# Altium PCB pcb.PcbDoc
Units mm, origin at the board's own origin, x right, y up, seen from the top; angles counter-clockwise.
Board outline 60 x 89 mm, 4 copper layers (Top Layer, Layer 1, Layer 2, Bottom Layer), stack 0.603 mm thick; 66 components, 44 nets, 228 pads, 102 vias.
Unrouted connection lines stored in the file: 2.
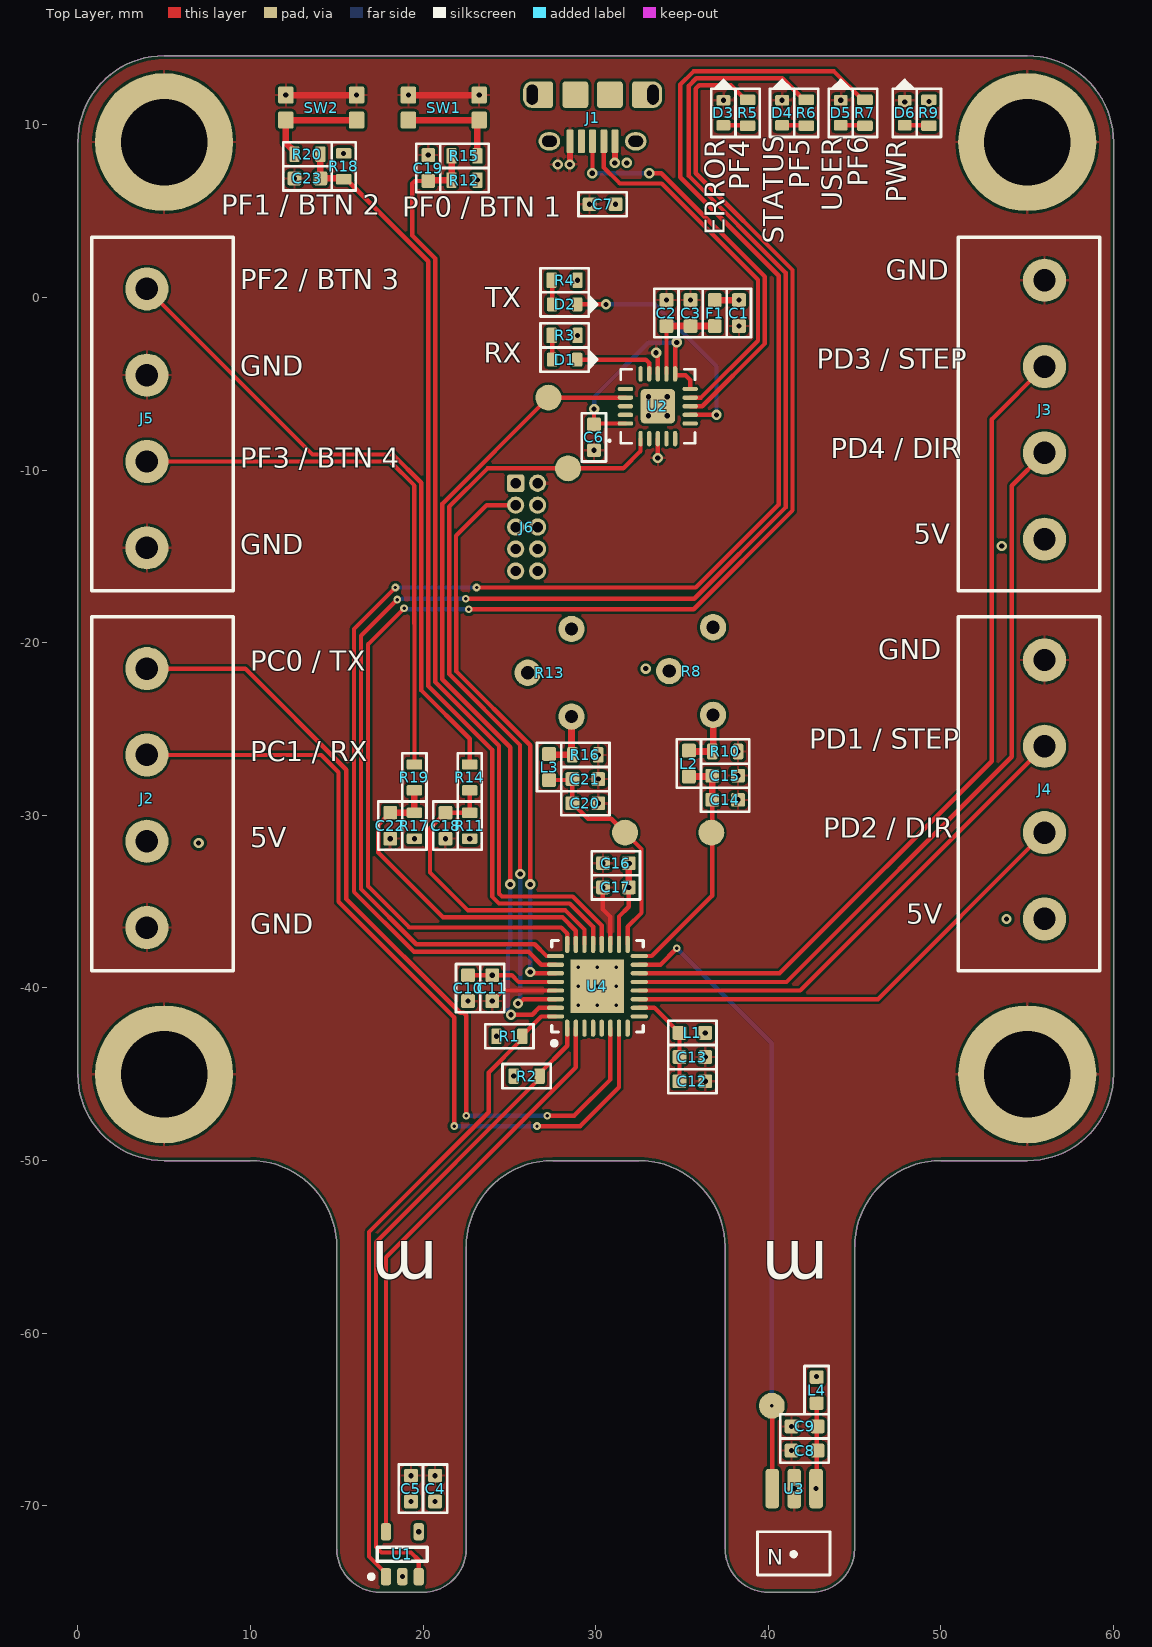
[diagram p0: Top Layer view]
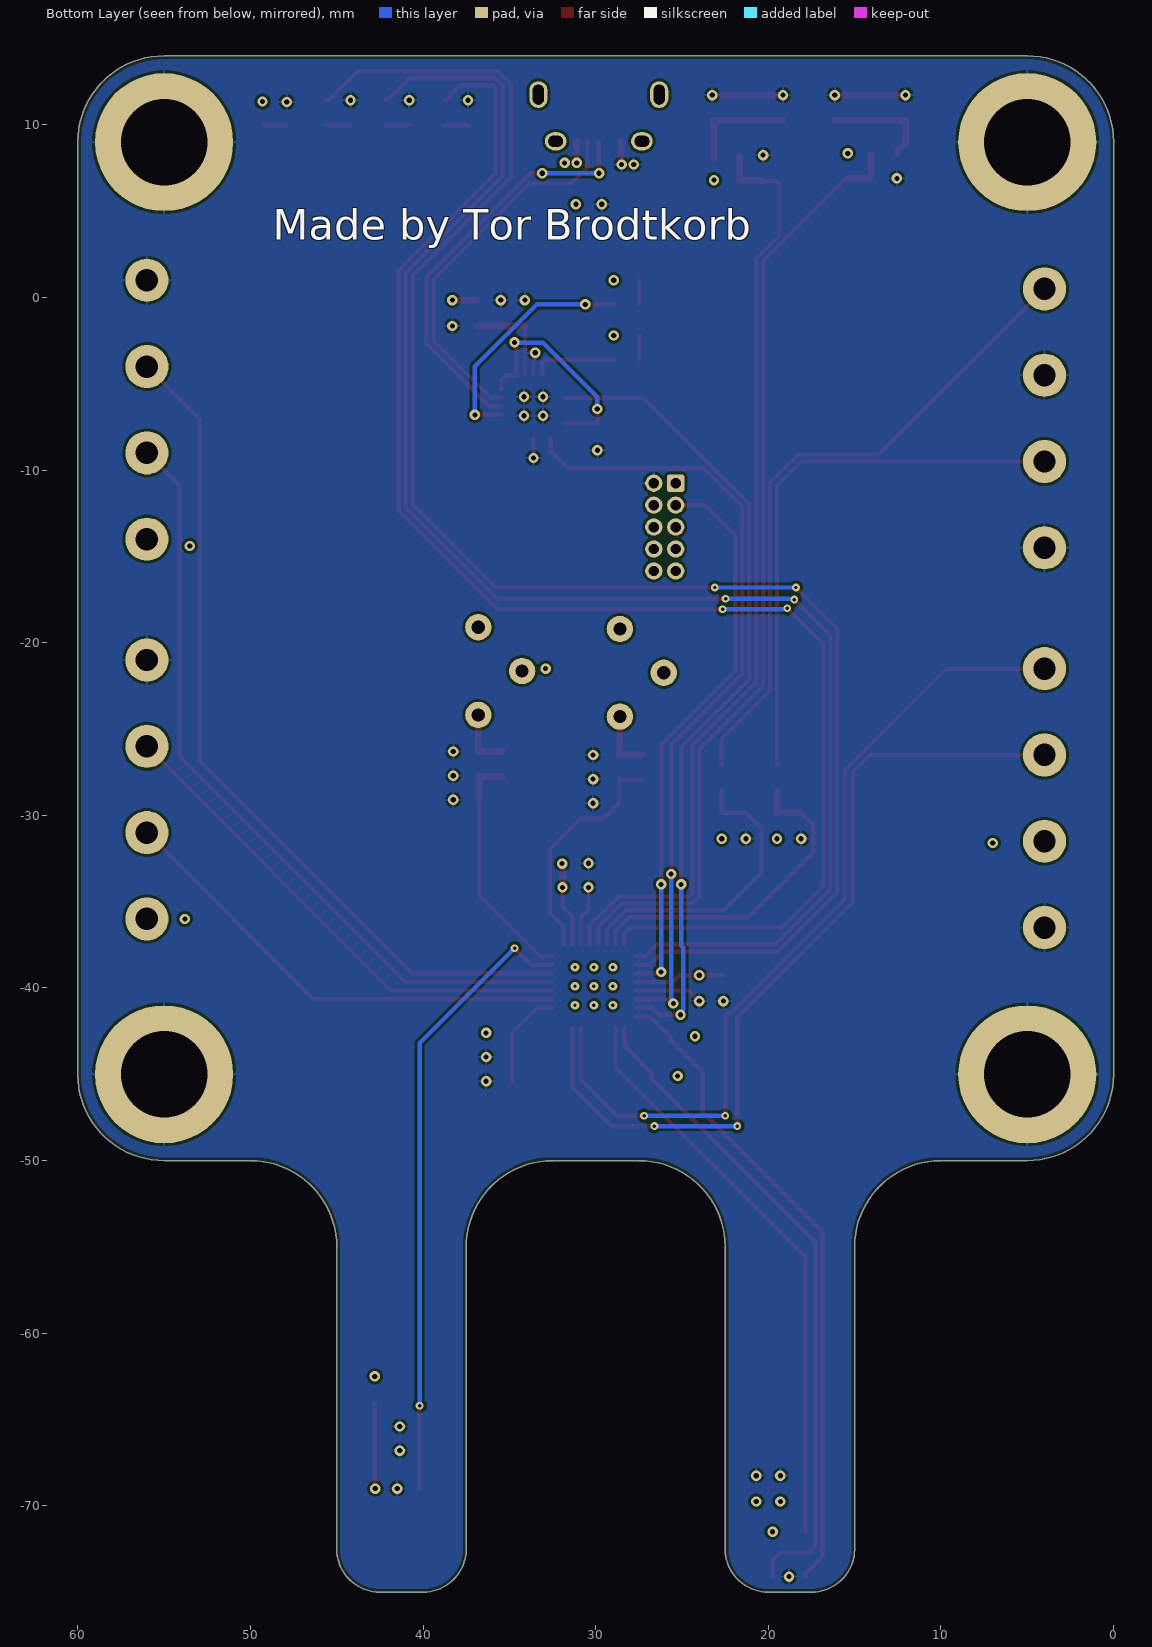
[diagram p1: Bottom Layer view, seen from below]
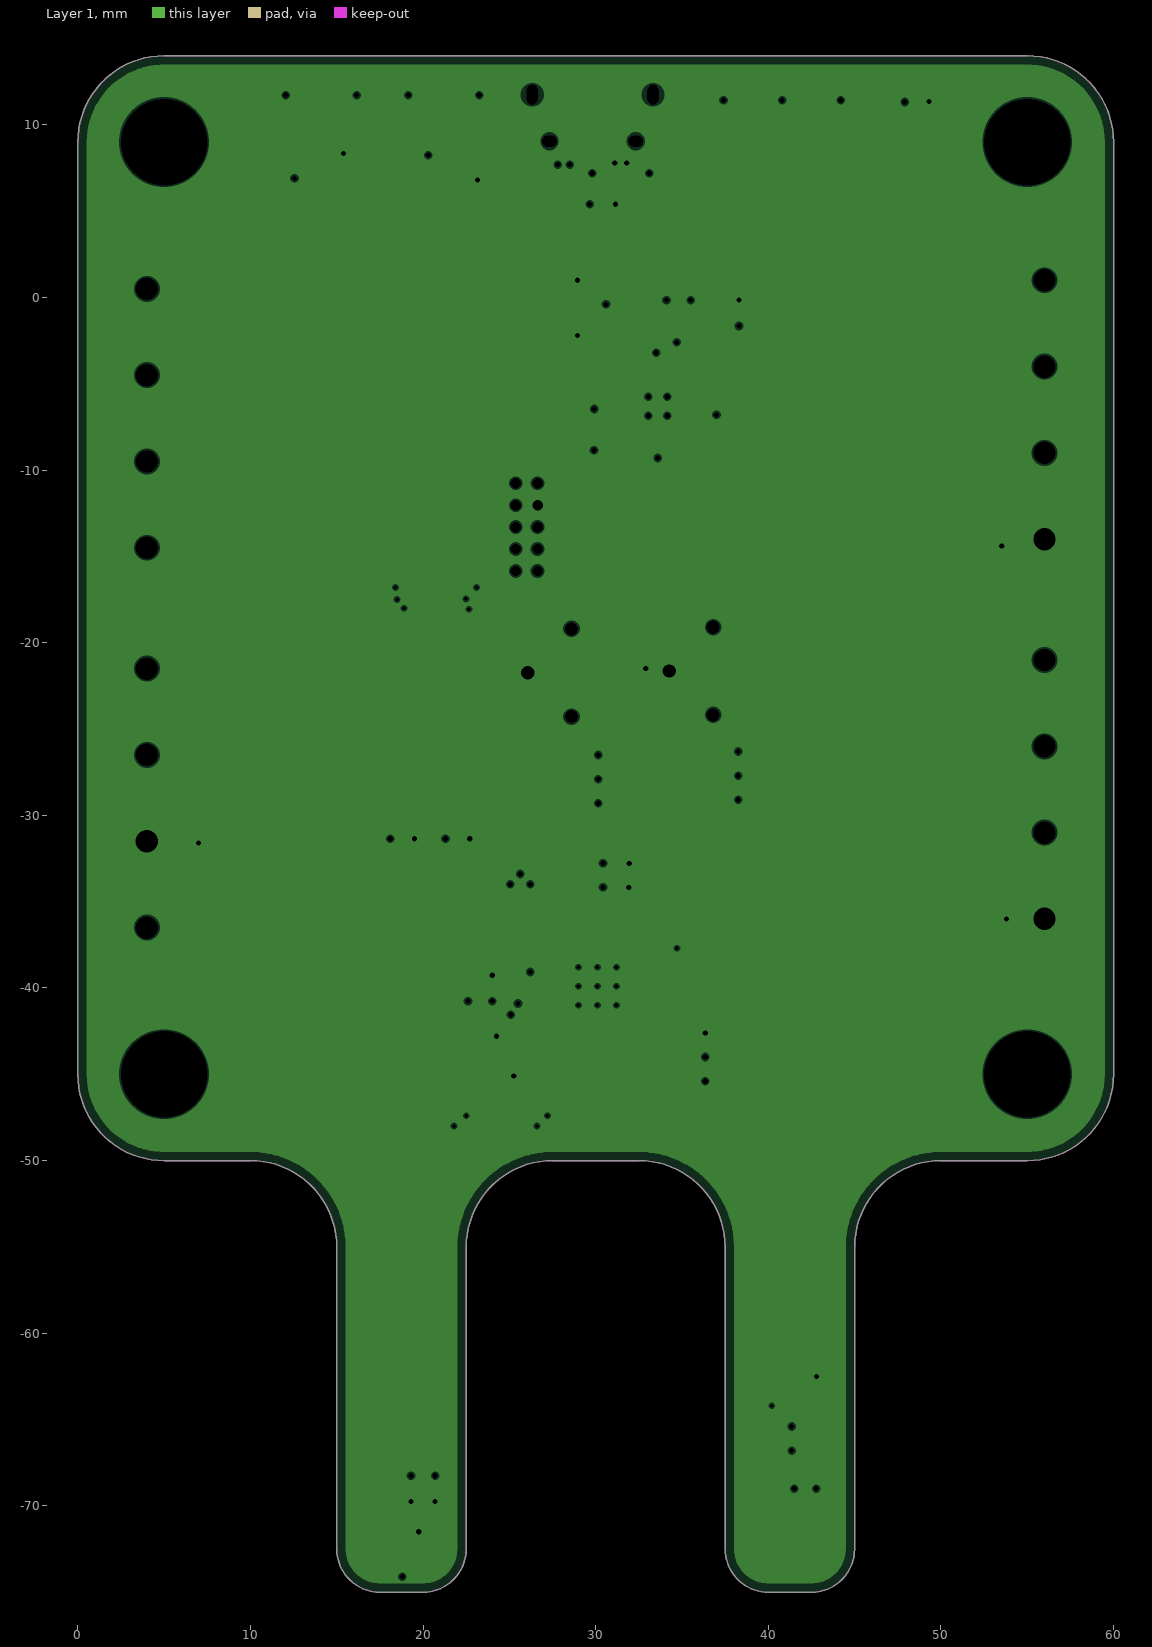
[diagram p2: Layer 1, clearances drawn from the general rule]
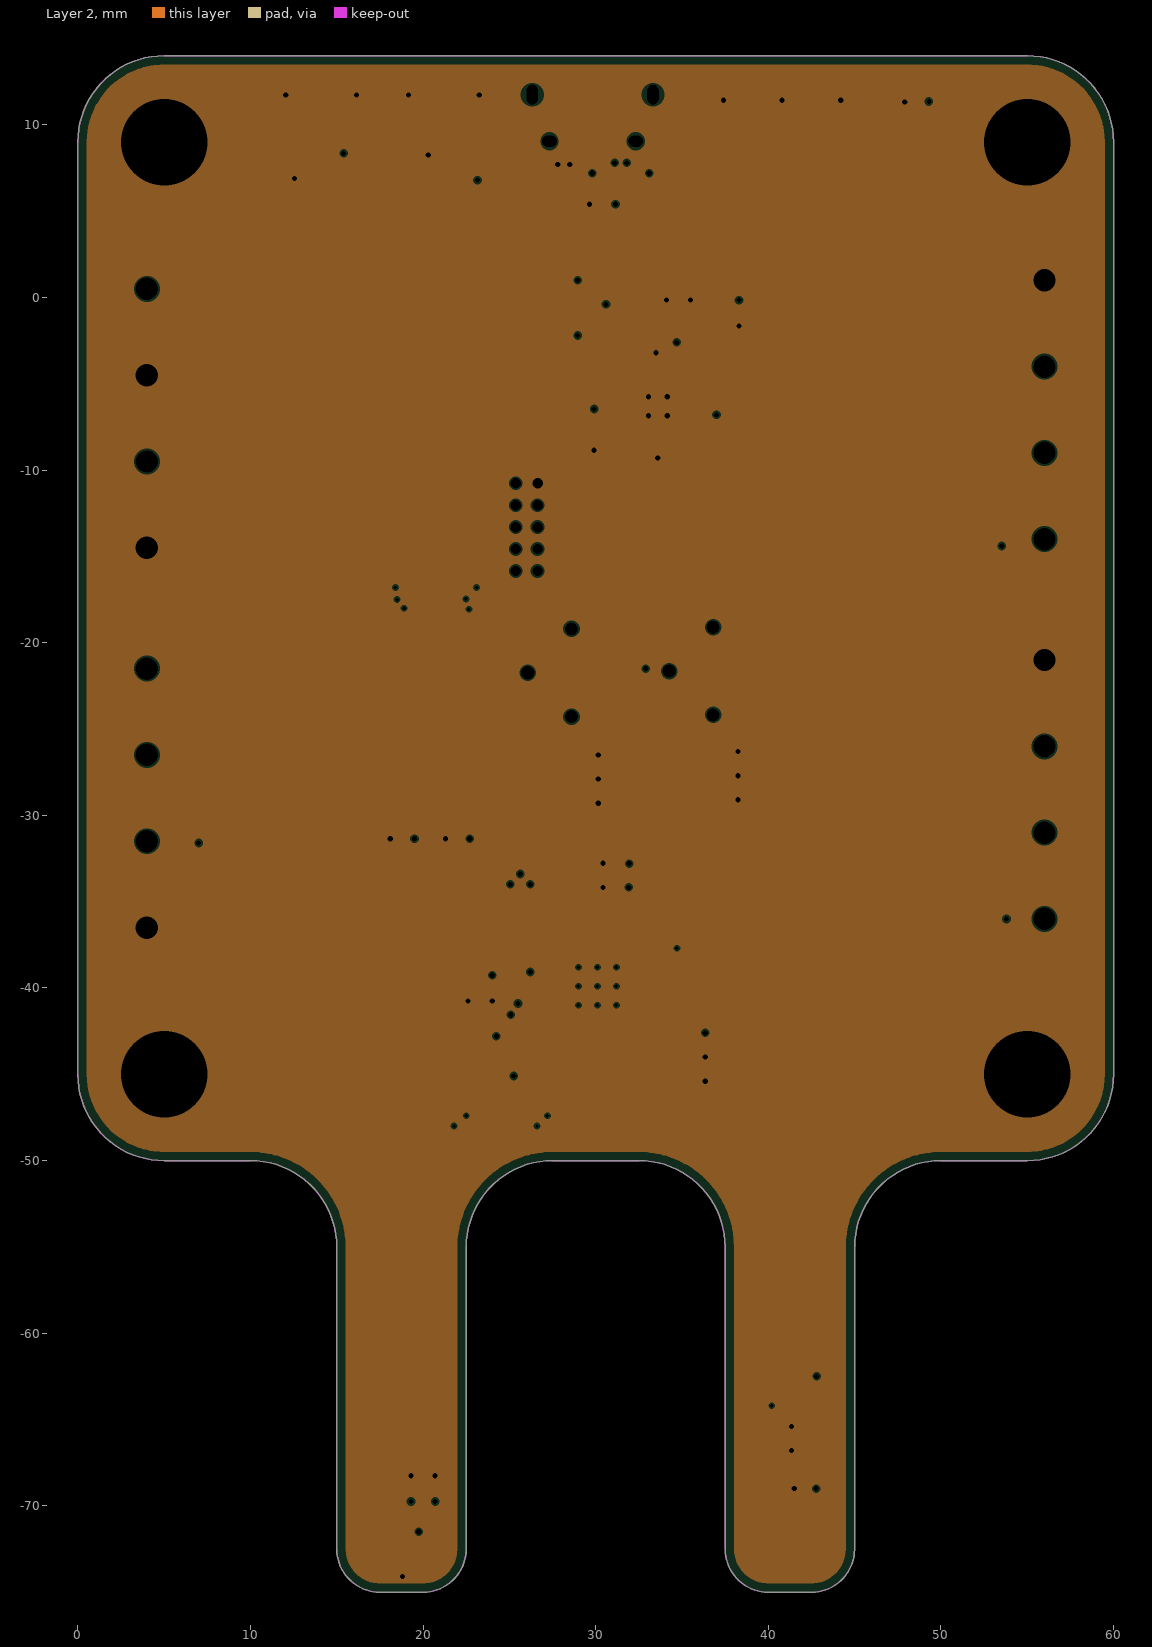
[diagram p3: Layer 2, clearances drawn from the general rule]
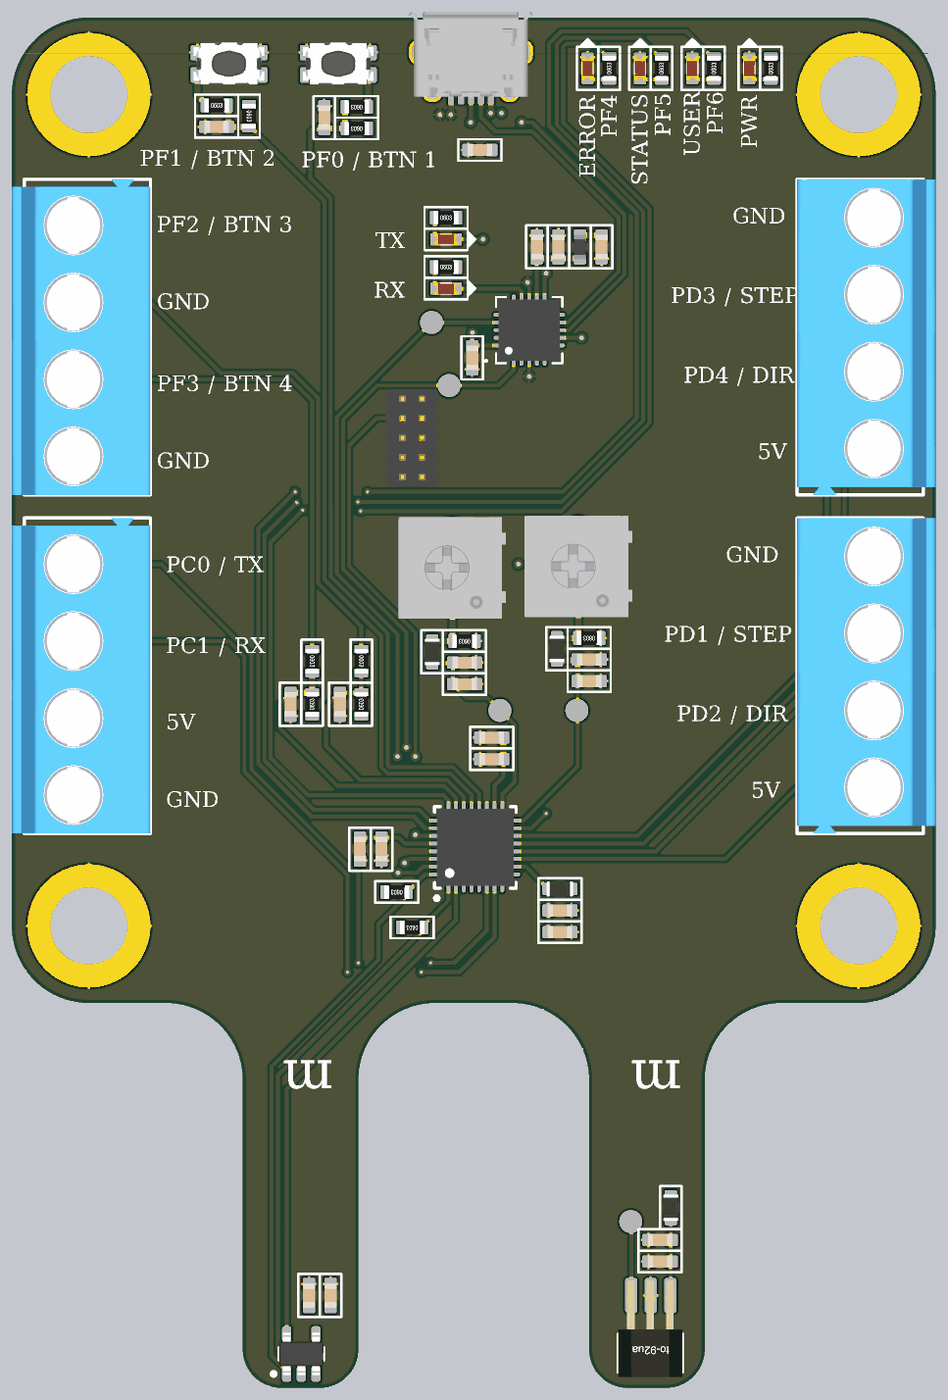
[diagram p4: 3D render of the assembled board from above, using the file's embedded part models]

## Layer stack, top to bottom
Top Solder: solder mask 0.0102, Solder Resist, Dk 3.5
Top Layer: signal copper 0.0356
Dielectric 2: prepreg 0.0711, PP-006, Dk 4.1
Layer 1: plane copper 0.035, net 5V
Dielectric 1: dielectric 0.32, FR-4, Dk 4.8
Layer 2: plane copper 0.035, net GND
Dielectric 3: prepreg 0.0711, PP-006, Dk 4.1
Bottom Layer: signal copper 0.0356
Bottom Solder: solder mask 0.0102, Solder Resist, Dk 3.5

## Board outline
17.5,-75 cw(c17.5,-72.5) 15,-72.5 15,-55 ccw(c10,-55) 10,-50 5,-50 cw(c5,-45) 0,-45 0,9 cw(c5,9) 5,14 55,14 cw(c55,9) 60,9 60,-45 cw(c55,-45) 55,-50 50,-50 ccw(c50,-55) 45,-55 45,-72.5 cw(c42.5,-72.5) 42.5,-75 40,-75 cw(c40,-72.5) 37.5,-72.5 37.5,-55 ccw(c32.5,-55) 32.5,-50 27.5,-50 ccw(c27.5,-55) 22.5,-55 22.5,-72.5 cw(c20,-72.5) 20,-75

## Design rules (kind name [scope] priority, off if disabled: settings)
BoardOutlineClearance [All] p1: gap=0.198 ignorepadtopadclearanceinfootprint=FALSE except(0: Arc-SplitContinuation Track-SplitContinuation SMDPad-SplitContinuation THPad-SplitContinuation Via-SplitContinuation Fill-SplitContinuation Poly-SplitContinuation Region-SplitContinuation Text-SplitContinuation)
Clearance [All] p1: gap=0.152 ignorepadtopadclearanceinfootprint=TRUE except(0.305: Arc-Hole Track-Hole SMDPad-Hole THPad-Hole Via-Hole Fill-Hole Poly-Hole Region-Hole Text-Hole)
ComponentClearance [All] p1: gap=0.1 collisioncheckmode=3 verticalgap=0.1 showdistances=FALSE
DiffPairsRouting DiffPairsRouting_USB [InDifferentialPair('USB')] p1: maxlimit=0.5 minlimit=0.16 mostfreqgap=0.2 toplayer_minwidth=0.16 toplayer_maxwidth=5 toplayer_prefwidth=0.265 bottomlayer_minwidth=0.16 bottomlayer_maxwidth=5 bottomlayer_prefwidth=0.265 maxuncoupledlength=12.7
DiffPairsRouting DiffPairsRouting_ETH [InDifferentialPair('ETH_RX') or InDifferentialPair('ETH_TX')] p2: maxlimit=0.5 minlimit=0.16 mostfreqgap=0.194 toplayer_minwidth=0.16 toplayer_maxwidth=5 toplayer_prefwidth=0.22 bottomlayer_minwidth=0.16 bottomlayer_maxwidth=5 bottomlayer_prefwidth=0.22 maxuncoupledlength=12.7
DiffPairsRouting [All] p3: maxlimit=0.5 minlimit=0.16 mostfreqgap=0.3 toplayer_minwidth=0.16 toplayer_maxwidth=5 toplayer_prefwidth=0.3 bottomlayer_minwidth=0.16 bottomlayer_maxwidth=5 bottomlayer_prefwidth=0.3 maxuncoupledlength=12.7
HoleSize [All] p1: absolutevalues=TRUE maxlimit=6.3 minlimit=0.025 maxpercent=80.000 minpercent=20.000
MatchedLengths MatchedLengths_1 [InNetClass('RX')] p1: tolerance=2 checknetsindiffpair=FALSE checkdiffpairvsdiffpair=TRUE checkxsignals=TRUE checkothers=TRUE
MatchedLengths [InNetClass('TX')] p2: tolerance=2 checknetsindiffpair=FALSE checkdiffpairvsdiffpair=TRUE checkxsignals=TRUE checkothers=TRUE
MinimumAnnularRing [All] p1: minimumring=0.102
MinimumSolderMaskSliver [All] p1: minsoldermaskwidth=0.05
PlaneClearance [All] p1: clearance=0.1
PlaneConnect [All] p1: planeconnectstyle=Relief reliefexpansion=0.15 reliefentries=4 reliefconductorwidth=0.152 reliefairgap=0.2
PolygonConnect [All] p1: connectstyle=Relief reliefconductorwidth=0.152 reliefentries=4 polygonreliefangle="90 Angle" airgapwidth=0.152
RoutingVias [All] p1: holewidth=0.3 width=0.6 viastyle="Through Hole" minholewidth=0.2 minwidth=0.45 maxholewidth=6.3 maxwidth=10
SilkToSilkClearance [All] p1: silktosilkclearance=0.152
SilkToSolderMaskClearance [IsPad] p1: minsilkscreentomaskgap=0.152 clearancetoexposedcopper=TRUE
SolderMaskExpansion [All] p1: expansion=0.076 istentingtop=FALSE
Width [All] p1: maxlimit=10 minlimit=0.152 preferedwidth=0.152 minimp=50.000000 maximp=50.000000 favimp=50.000000
22 further rules are at their usual default settings.

## Components (designator, comment, footprint, x,y, rotation, side; value= is the part's Value field where it differs from the comment)
C1 "passive_5" "capacitor 0603" 38.3,-0.9 r90 top value=10nF
C2 "passive_5" "capacitor 0603" 34.1,-0.9 r270 top value=4.7uF
C3 "passive_5" "capacitor 0603" 35.5,-0.9 r270 top value=100nF
C4 "passive_5" "capacitor 0603" 20.7,-69 r270 top value=10uF
C5 "passive_5" "capacitor 0603" 19.3,-69 r270 top value=100nF
C6 "passive_5" "capacitor 0603" 29.9,-8.1 r90 top value=100nF
C7 "passive_5" "capacitor 0603" 30.4,5.4 r0 top value=10uF
C8 "passive_5" "capacitor 0603" 42.1,-66.8 r0 top value=10uF
C9 "passive_5" "capacitor 0603" 42.1,-65.4 r0 top value=100nF
C10 "passive_5" "capacitor 0603" 22.605,-40.01 r90 top value=10uF
C11 "passive_5" "capacitor 0603" 24.005,-40.01 r90 top value=100uF
C12 "passive_5" "capacitor 0603" 35.6,-45.4 r180 top value=10uF
C13 "passive_5" "capacitor 0603" 35.6,-44 r180 top value=100uF
C14 "passive_5" "capacitor 0603" 37.5,-29.1 r180 top value=100nF
C15 "passive_5" "capacitor 0603" 37.5,-27.7 r180 top value=10uF
C16 "passive_5" "capacitor 0603" 31.17,-32.77 r0 top value=10uF
C17 "passive_5" "capacitor 0603" 31.17,-34.17 r0 top value=100uF
C18 "passive_5" "capacitor 0603" 21.3,-30.6 r90 top value=100nF
C19 "passive_5" "capacitor 0603" 20.3,7.5 r270 top value=100nF
C20 "passive_5" "capacitor 0603" 29.4,-29.3 r180 top value=100nF
C21 "passive_5" "capacitor 0603" 29.4,-27.9 r180 top value=10uF
C22 "passive_5" "capacitor 0603" 18.1,-30.6 r90 top value=100nF
C23 "passive_5" "capacitor 0603" 13.3,6.9 r0 top value=100nF
D1 "LED Red" "LED 0603 red" 28.2,-3.6 r0 top
D2 "LED Red" "LED 0603 red" 28.2,-0.4 r0 top
D3 "LED Red" "LED 0603 red" 37.4,10.7 r90 top
D4 "LED Red" "LED 0603 red" 40.8,10.7 r90 top
D5 "LED Red" "LED 0603 red" 44.2,10.7 r90 top
D6 "LED Red" "LED 0603 red" 47.9,10.7 r90 top
F1 "passive_8" "ferrit bead 0603" 36.9,-0.9 r270 top value="480Ω @ 100MHz"
J1 "USB micro B" "USB mico B female" 29.82,10.4 r180 top
J2 "Header 2.54mm" TB001-500-04BE 4,-36.5 r90 top
J3 "Header 2.54mm" TB001-500-04BE 56,1 r270 top
J4 "Header 2.54mm" TB001-500-04BE 56,-21 r270 top
J5 "Header 2.54mm" TB001-500-04BE 4,-14.5 r90 top
J6 "Header 1.27mm" "header male 2x5, pitch 1.27mm" 26,-13.3 r0 top
L1 "passive_9" "inductor 0603" 35.6,-42.6 r180 top value=10uH
L2 "passive_9" "inductor 0603" 35.4,-27 r270 top value=10uH
L3 "passive_9" "inductor 0603" 27.3,-27.2 r270 top value=10uH
L4 "passive_9" "inductor 0603" 42.8,-63.3 r270 top value=10uH
R1 "passive_2" "resistor 0603" 25,-42.8 r180 top value=1kΩ
R2 "passive_2" "resistor 0603" 26,-45.1 r180 top value=1kΩ
R3 "passive_2" "resistor 0603" 28.2,-2.2 r0 top value=1kΩ
R4 "passive_2" "resistor 0603" 28.2,1 r0 top value=1kΩ
R5 "passive_2" "resistor 0603" 38.8,10.7 r90 top value=1kΩ
R6 "passive_2" "resistor 0603" 42.2,10.7 r90 top value=1kΩ
R7 "passive_2" "resistor 0603" 45.6,10.7 r90 top value=1kΩ
R8 "passive_13" POT 34.26,-21.64 r90 top value=1kΩ
R9 "passive_2" "resistor 0603" 49.3,10.7 r90 top value=1kΩ
R10 "passive_2" "resistor 0603" 37.5,-26.3 r180 top value=1kΩ
R11 "passive_2" "resistor 0603" 22.7,-30.6 r90 top value=10kΩ
R12 "passive_2" "resistor 0603" 22.4,6.8 r180 top value=10kΩ
R13 "passive_13" POT 26.06,-21.74 r90 top value=1kΩ
R14 "passive_2" "resistor 0603" 22.7,-27.8 r270 top value=1kΩ
R15 "passive_2" "resistor 0603" 22.4,8.2 r180 top value=1kΩ
R16 "passive_2" "resistor 0603" 29.4,-26.5 r180 top value=1kΩ
R17 "passive_2" "resistor 0603" 19.5,-30.6 r90 top value=10kΩ
R18 "passive_2" "resistor 0603" 15.4,7.6 r270 top value=10kΩ
R19 "passive_2" "resistor 0603" 19.5,-27.8 r270 top value=1kΩ
R20 "passive_2" "resistor 0603" 13.3,8.3 r0 top value=1kΩ
SW1 "sensor_3" "KMR621NG LFS" 21.2,11 r180 top
SW2 "sensor_3" "KMR621NG LFS" 14.1,11 r180 top
U1 "ic_14" SI7210-B-00-IVR 18.8,-72.8 r90 top
U2 "FTDI" FT231XQ-R 33.6,-6.3 r90 top
U3 "ic_15" SS495A1 42.77,-69 r180 top
U4 "cpu_7" AVRxxDB32 30.1,-39.9 r90 top

## Footprints (in the part's own frame and the unit in brackets; to place one, negate y for a bottom-side part, rotate by r counter-clockwise, add the part's x,y. Pads: shape width x height; smd on the part's side, far side on the other; paste and mask are expansions set on the pad)
AVRxxDB32 [mm] "QFN, 32-Leads, Body 5.00x5.00mm, Pitch 0.50mm, Thermal Pad 3.10x3.10mm, IPC Low Density"
  oval 1x0.25 smd: 1(-2.425,1.75) 2(-2.425,1.25) 3(-2.425,0.75) 4(-2.425,0.25) 5(-2.425,-0.25) 6(-2.425,-0.75) 7(-2.425,-1.25) 8(-2.425,-1.75) 17(2.425,-1.75) 18(2.425,-1.25) 19(2.425,-0.75) 20(2.425,-0.25) 21(2.425,0.25) 22(2.425,0.75) 23(2.425,1.25) 24(2.425,1.75)
  oval 0.25x1 smd: 9(-1.75,-2.425) 10(-1.25,-2.425) 11(-0.75,-2.425) 12(-0.25,-2.425) 13(0.25,-2.425) 14(0.75,-2.425) 15(1.25,-2.425) 16(1.75,-2.425) 25(1.75,2.425) 26(1.25,2.425) 27(0.75,2.425) 28(0.25,2.425) 29(-0.25,2.425) 30(-0.75,2.425) 31(-1.25,2.425) 32(-1.75,2.425)
  rect 3.1x3.1 smd: 33(0,0)
  silkscreen extent -3.42,-2.65 2.65,2.65, body extent -2.5,-2.5 2.5,2.5, height 0.8
"capacitor 0603" [mm]
  rrect25% 0.8x0.8 smd: 1(-0.75,0) 2(0.75,0)
  silkscreen extent -1.4,-0.7 1.4,0.7, body extent -0.8,-0.4 0.8,0.4, height 0.8
"ferrit bead 0603" [mm]
  rrect25% 0.8x0.8 smd: 1(-0.75,0) 2(0.75,0)
  silkscreen extent -1.4,-0.7 1.4,0.7, body extent -0.79,-0.4 0.81,0.4, height 0.8
FT231XQ-R [mm] "QFN, 20-Leads, Body 4.00x4.00mm, Pitch 0.50mm, Thermal Pad 1.98x1.98mm, IPC Medium Density"
  oval 0.9x0.25 smd: 1(-1.875,1) 2(-1.875,0.5) 3(-1.875,0) 4(-1.875,-0.5) 5(-1.875,-1) 11(1.875,-1) 12(1.875,-0.5) 13(1.875,0) 14(1.875,0.5) 15(1.875,1)
  oval 0.25x0.9 smd: 6(-1,-1.875) 7(-0.5,-1.875) 8(0,-1.875) 9(0.5,-1.875) 10(1,-1.875) 16(1,1.875) 17(0.5,1.875) 18(0,1.875) 19(-0.5,1.875) 20(-1,1.875)
  rrect20% 1.98x1.98 smd: 21(0,0)
  silkscreen extent -2.15,-2.15 2.15,2.85, body extent -2,-2 2,2, height 0.8
"header male 2x5, pitch 1.27mm" [mm]
  rrect25% 1x1 hole 0.6: 1(-0.635,2.54)
  round 1 hole 0.6: 2(0.635,2.54) 3(-0.635,1.27) 4(0.635,1.27) 5(-0.635,0) 6(0.635,0) 7(-0.635,-1.27) 8(0.635,-1.27) 9(-0.635,-2.54) 10(0.635,-2.54)
  body extent -1.7,-3.17 1.7,3.17, height 5.35
"inductor 0603" [mm]
  rrect25% 0.8x0.8 smd: 1(-0.75,0) 2(0.75,0)
  silkscreen extent -1.4,-0.7 1.4,0.7, body extent -0.87,-0.48 0.87,0.48, height 0.91
"KMR621NG LFS" [mm]
  rrect25% 0.9x1 smd: 1(-2.05,0.725) 1(2.05,0.725) 2(-2.05,-0.725) 2(2.05,-0.725)
  body extent -2.3,-1.4 2.3,1.4, height 1.9
"LED 0603 red" [mm]
  rrect25% 0.6x0.8 smd: 1(-0.725,0) 2(0.725,0)
  silkscreen extent -1.4,-0.7 1.9,0.7, body extent -0.8,-0.4 0.8,0.4, height 0.6
POT [mil]
  round 60 hole 30: 1(100,-100) 2(0,0) 3(-100,-100)
  body extent -130,-238 130,37, height 185
"resistor 0603" [mm]
  rrect25% 0.6x0.9 smd: 1(-0.75,0) 2(0.75,0)
  silkscreen extent -1.4,-0.7 1.4,0.7, body extent -0.8,-0.45 0.8,0.45, height 0.5
SI7210-B-00-IVR [mm] "SOT23, 5-Leads, Body 2.90x2.75mm, Pitch 0.95mm, IPC Medium Density"
  rrect50% 1x0.6 smd: 1(-1.3,0.95) 2(-1.3,0) 3(-1.3,-0.95) 4(1.3,-0.95) 5(1.3,0.95)
  silkscreen extent -1.42,-1.45 0.4,1.92, body extent -1.38,-1.45 1.38,1.45, height 1.25
SS495A1 [mm]
  rrect50% 0.8x2.3 smd: 1(0,0) 2(1.27,0) 3(2.54,0)
  silkscreen extent -0.8,2.5 3.4,5, body extent -0.79,-0.96 3.38,5.3, height 1.34
TB001-500-04BE [mm]
  round 2.5 hole 1.3: 1(15,0) 2(10,0) 3(5,0) 4(0,0)
  silkscreen extent -2.5,-5 18,3.2, body extent -2.5,-5 18,4, height 12.5
"USB mico B female" [mm]
  rrect25% 0.4x1.35 smd: 1(-1.3,1.35) 2(-0.65,1.35) 3(0,1.35) 4(0.65,1.35) 5(1.3,1.35)
  rrect100% 1.05x1.55 hole 0.65 slot 1.15 at 90 deg: 6(-3.5,-1.35) 6(3.5,-1.35)
  rrect25% 1.37x1.55 smd: 6(-2.975,-1.35) 6(2.975,-1.35)
  rrect100% 1.25x1.05 hole 0.65 slot 0.85 at 0 deg: 6(-2.5,1.35) 6(2.5,1.35)
  rrect25% 1.5x1.55 smd: 6(-1,-1.35) 6(1,-1.35)
  body extent -4.01,-3.99 4.03,1.59, height 2.76

## Part data
C1 C2 C3 C4 C5 C6 C7 C8 C9 C10 C11 C12 C13 C14 C15 C16 C17 C18 C19 C20 C21 C22 C23: "Capacitor 0603"
D1 D2 D3 D4 D5 D6: library part diode_0, "LED 0603 red"
F1: "Ferrite bead 0603"
J1: library part connector_34, "USB micro B (2.0)", Manufacturer 1="Amphenol ICC (FCI)", Manufacturer Part Number 1=10118194-0001LF, Supplier Part Number 1=609-4618-1-ND, Link=https://www.digikey.no/product-detail/en/amphenol-icc-fci/10118194-0001LF/609-4618-1-ND/2785382, Supplier 1=Digi-Key
J2 J3 J4 J5: library part connector_53, "Screw Terminal"
J6: library part connector_17, "Header male 2x5, pitch 1.27mm"
L1 L2 L3 L4: "Inductor 0603"
R1 R2 R3 R4 R5 R6 R7 R9 R10 R11 R12 R14 R15 R16 R17 R18 R19 R20: "Resistor 0603"
R8 R13: "Potmeter"
SW1 SW2: "Tactile switch SMD, tiny", Manufacturer 1=C&K, Manufacturer Part Number 1="KMR621NG LFS", Supplier Part Number 1=CKN10684CT-ND, Link=https://www.digikey.no/product-detail/en/c-k/KMR621NG-LFS/CKN10684CT-ND/6035356, Supplier 1=Digi-Key
U1: "Hall-effect", Supplier Part Number 1=SI7210-B-00-IVR
U2: library part ic_1, "USB to UART converter, FTDI, single, 20 pins, QFN", Manufacturer 1="FTDI, Future Technology Devices International Ltd", Manufacturer Part Number 1=FT231XQ-R, Supplier Part Number 1=768-1128-1-ND, Supplier 1=Digi-Key
U3: "SS495A1"
U4: "AVRxxDB32"

## Free pads (board coordinates)
  round 8 hole 5: ""(5,-45) ""(5,9) ""(55,9) ""(55,-45)
  round 1.5 smd: ""(27.262,-5.8) ""(28.4,-9.9) ""(31.7,-31) ""(36.7,-31) ""(40.2,-64.2)

## Via types
v1: diameter 0.6, hole 0.3, Top Layer to Bottom Layer, tented both sides, 77 vias
v2: diameter 0.45, hole 0.2, Top Layer to Bottom Layer, tented both sides, 12 vias
v3: diameter 0.5, hole 0.2, Top Layer to Bottom Layer, 9 vias
v4: diameter 0.6, hole 0.3, Top Layer to Bottom Layer, 4 vias

## Nets (pads, with @x,y where several pads share a name; then routed paths per layer and width w, separated by ;. In a path a pad name is that pad's centre, name@x,y a point inside that pad or via, vN(x,y) a via of type N, cw(c..) or ccw(c..) an arc to the next point about the centre after c; other vN are vias at no path point)
5V: C1.2 C4.2 C5.2 C7.2 C10.2 C11.2 C16.2 C17.2 F1.1 J1.1 J2.3 J3.1 J4.1 J6.4 L1.1 L4.1 R1.2 R2.2 R3.2 R4.2 R8.2 R9.2 R11.1 R12.1 R13.2 R17.1 R18.1 U1.4 U4.18 U4.28 | length 12.9
  Top Layer w0.25: C10.2 v1(24.005,-39.26) 25.145,-39.26 25.535,-39.65 U4.28 ; v1(31.1,7.8) v1@31.12,7.82 ; U4.18 31.35,-35.86 31.92,-35.29 v1(31.92,-34.17) ; C16.2 C16.2@31.97,-32.82
  Top Layer w0.35: v1@31.12,7.82 J1.1
  Top Layer w0.381: v1(31.92,-34.17) C16.2 ; F1.1 v1(38.3,-0.15)
  other v1: 19.75,-71.5 19.3,-69.75 20.7,-69.75 42.8,-62.5 25.252,-45.1 24.25,-42.8 36.35,-42.6 53.8,-36 31.945,-32.795 7,-31.6 19.5,-31.35 22.7,-31.35 32.9,-21.5 53.52,-14.395 28.95,-2.2 28.95,1 31.15,5.4 23.15,6.8 31.8,7.8 15.4,8.35 49.3,11.35
ALERT: U1.5 U4.2 | length 33.7
  Top Layer w0.25: U1.5 17.85,-55.6 28.85,-44.6 U4.2
DIR1: J4.3 U4.12 | length 29.3
  Top Layer w0.25: U4.12 41.85,-40.15 J4.3
DIR2: J3.3 U4.14 | length 49.6
  Top Layer w0.25: U4.14 40.65,-39.15 52.94,-26.86 52.94,-7.06 J3.3
EXT_RX: J2.2 U4.7 | length 48.7
  Top Layer w0.25: J2.2 14.1,-26.5 15.1,-27.5 15.1,-35 21.8,-41.7 v2(21.8,-48) ; v2(26.6,-48) 29.1,-48 31.35,-45.75 U4.7
  Bottom Layer w0.25: v2(21.8,-48) v2(26.6,-48)
EXT_TX: J2.1 U4.6 | length 49.2
  Top Layer w0.25: J2.1 9.7,-21.5 15.556,-27.356 15.556,-34.844 22.149,-41.437 22.354,-41.437 22.5,-41.584 v2(22.5,-47.4) ; v2(27.2,-47.4) 28.75,-47.4 30.85,-45.3 U4.6
  Bottom Layer w0.25: v2(22.5,-47.4) v2(27.2,-47.4)
GND: C1.1 C2.1 C3.1 C4.1 C5.1 C6.1 C7.1 C8.1 C9.1 C10.1 C11.1 C12.1 C13.1 C14.1 C15.1 C16.1 C17.1 C18.1 C19.1 C20.1 C21.1 C22.1 C23.1 D3.2 D4.2 D5.2 D6.2 J1.5 J2.4 J3.4 J4.4 J5.2 J5.4 J6.2 pad.@5,9 pad.@5,-45 pad.@55,9 pad.@55,-45 R10.1 R16.1 SW1.2 SW2.2 U1.2 U2.3 U2.13 U2.21 U3.2 U4.19 U4.29 | length 19.4
  Top Layer w0.25: v1(24.005,-40.76) 24.615,-40.15 U4.29 ; v1(30.42,-34.17) 30.415,-34.175 30.415,-35.445 30.85,-35.88 U4.19 ; v1(33.5,-3.2) 33.5,-3.295 33.6,-3.395 U2.13 ; v1(33.6,-9.3) U2.3
  Top Layer w0.35: v1@28.52,7.7 J1.5
  Top Layer w0.381: v1(12.05,11.725) v1(16.15,11.725) ; v1(19.15,11.725) v1(23.25,11.725)
  other v1: 18.8,-74.1 41.5,-69 19.3,-68.25 20.7,-68.25 41.35,-66.8 41.35,-65.4 36.35,-45.4 36.35,-44 22.605,-40.76 30.42,-32.77 18.1,-31.35 21.3,-31.35 30.15,-29.3 38.25,-29.1 30.15,-27.9 38.25,-27.7 30.15,-26.5 38.248,-26.3 29.9,-8.85 38.3,-1.65 34.1,-0.15 35.5,-0.15 29.65,5.4 12.55,6.9 27.8,7.7 28.5,7.7 20.3,8.25 47.9,11.325 37.4,11.425 40.8,11.425 44.2,11.425
  other v4: 33.05,-6.85 34.15,-6.85 33.05,-5.75 34.15,-5.75
HALL: pad.@40.2,-64.2 U3.3 U4.15 | length 36.2
  Top Layer w0.25: U4.15 33.75,-38.65 v2(34.7,-37.7) ; v2(40.2,-64.2) 40.23,-64.23 U3.3
  Bottom Layer w0.25: v2(34.7,-37.7) 40.2,-43.2 v2(40.2,-64.2)
LED1: R5.2 U4.24 | length 85.4
  Top Layer w0.25: v2@18.887,-18.013 16.805,-20.095 16.805,-34.098 19.207,-36.5 28,-36.5 28.35,-36.85 U4.24 ; v2(22.652,-18.06) 35.679,-18.06 41.405,-12.333 41.405,1.595 35.8,7.2 35.8,12.1 35.995,12.295 37.837,12.295 38.475,11.657 38.475,11.625 38.65,11.45 R5.2
  Bottom Layer w0.25: v2(18.9,-18) 18.938,-18.038 19.08,-18.038 19.101,-18.06 v2(22.652,-18.06)
LED2: R6.2 U4.25 | length 89.5
  Top Layer w0.25: v2(18.5,-17.5) 16.402,-19.598 16.402,-34.264 19.604,-37.465 26.465,-37.465 27.15,-38.15 U4.25 ; v2(22.476,-17.455) 35.714,-17.455 41.002,-12.167 41.002,1.429 35.398,7.033 35.398,12.267 35.829,12.698 40.802,12.698 42.05,11.45 R6.2
  Bottom Layer w0.25: v2(18.5,-17.5) 18.538,-17.462 18.78,-17.462 18.786,-17.455 v2(22.476,-17.455)
LED3: R7.2 U4.26 | length 94.6
  Top Layer w0.25: v2(18.4,-16.8) 16,-19.2 16,-34.431 19.471,-37.902 26.102,-37.902 26.85,-38.65 U4.26 ; v2(23.1,-16.8) 35.8,-16.8 40.6,-12 40.6,1.262 34.9,6.962 34.9,12.338 35.662,13.1 43.8,13.1 45.45,11.45 R7.2
  Bottom Layer w0.25: v2(18.4,-16.8) v2(23.1,-16.8)
NetC2_2: C2.2 C3.2 F1.2 U2.12 | length 5.6
  Top Layer w0.25: U2.12 34.1,-3.649 C2.2
  Top Layer w0.381: C2.2 C3.2 F1.2
NetC6_2: C6.2 U2.10 U2.11 U2.20 | length 12.9
  Top Layer w0.25: C6.2@29.895,-7.345 C6.2@29.9,-7.341 ; C6.2 C6.2@29.9,-7.341 ; v1(29.91,-6.46) 29.9,-6.47 C6.2@29.9,-7.341 ; U2.20 29.941,-7.3 C6.2@29.9,-7.341 ; U2.11@34.6,-4.5 35.2,-4.5 35.475,-4.775 U2.10 ; U2.11 34.6,-3.2 34.6,-2.921 34.633,-2.888 34.633,-2.667 v1(34.7,-2.6)
  Bottom Layer w0.25: v1(29.91,-6.46) 29.91,-5.76 33.05,-2.62 34.68,-2.62 v1(34.7,-2.6)
NetC8_2: C8.2 C9.2 L4.2 U3.1 | length 5
  Top Layer w0.25: v1(42.77,-69) 42.8,-68.97 L4.2
NetC14_2: C14.2 C15.2 L2.2 pad.@36.7,-31 U4.16 | length 14
  Top Layer w0.25: U4.16 33.25,-38.15 36.75,-34.65 C14.2
  Top Layer w0.381: L2.2 36.7,-27.75 C15.2 C14.2
NetC20_2: C20.2 C21.2 L3.2 pad.@31.7,-31 U4.17 | length 13.7
  Top Layer w0.25: L3.2 28.6,-27.95 C21.2 C20.2 29.55,-30.2 30.9,-30.2 32.65,-31.95 32.65,-35.65 31.85,-36.45 U4.17
NetD1_1: D1.1 R3.1 | length 1.4
  Top Layer w0.25: R3.1 27.475,-2.225 D1.1
NetD2_1: D2.1 R4.1 | length 1.4
  Top Layer w0.25: R4.1 27.475,0.975 D2.1
NetD3_1: D3.1 R5.1 | length 1.4
  Top Layer w0.25: D3.1 38.775,9.975 R5.1
NetD4_1: D4.1 R6.1 | length 1.4
  Top Layer w0.25: D4.1 42.175,9.975 R6.1
NetD5_1: D5.1 R7.1 | length 1.4
  Top Layer w0.25: D5.1 45.575,9.975 R7.1
NetD6_1: D6.1 R9.1 | length 1.4
  Top Layer w0.25: D6.1 49.275,9.975 R9.1
NetJ1_2: J1.2 U2.9 | length 22
  Top Layer w0.25: J1.2 30.47,7.53 31.4,6.6 33.831,6.6 39.398,1.033 39.398,-2.502 36.1,-5.8 U2.9
NetJ1_3: J1.3 U2.8 | length 24
  Top Layer w0.25: v1(29.8,7.2) 29.82,7.22 J1.3 ; v1(33.1,7.2) 33.8,7.2 39.8,1.2 39.8,-2.669 36.169,-6.3 U2.8
  Bottom Layer w0.25: v1(29.8,7.2) v1(33.1,7.2)
NetJ5_1: J5.1 R14.1 | length 38
  Top Layer w0.25: J5.1 13.598,-9.098 13.667,-9.098 18.267,-9.098 19.9,-10.731 19.9,-18.167 19.902,-18.169 19.902,-22.764 22.7,-25.562 R14.1
NetJ5_3: J5.3 R19.1 | length 32.2
  Top Layer w0.25: J5.3 18.1,-9.5 19.498,-10.898 19.498,-18.885 19.5,-18.887 R19.1
NetJ6_3: J6.3 U4.27 | length 32.7
  Top Layer w0.25: J6.3 23.682,-12.03 21.912,-13.8 21.912,-17.333 21.914,-17.335 21.914,-21.645 26.21,-25.941 v1(26.21,-34) ; v1(26.21,-39.07) 26.304,-39.07 26.384,-39.15 U4.27
  Bottom Layer w0.25: v1(26.21,-39.07) v1(26.21,-34)
NetL2_1: L2.1 R8.3 R10.2 | length 3.5
  Top Layer w0.381: L2.1 35.45,-26.3 R10.2 36.8,-26.25 R8.3
NetL3_1: L3.1 R13.3 R16.2 | length 3.6
  Top Layer w0.381: L3.1 27.35,-26.5 R16.2 28.6,-26.45 R13.3
NetR15_1: R15.1 SW1.1 | length 6.4
  Top Layer w0.381: SW1.1@19.15,10.275 23.25,10.275 23.15,10.175 R15.1 R15.1@23.15,8.05
NetR20_1: R20.1 SW2.1 | length 6.3
  Top Layer w0.381: R20.1 12.55,8.45 12.05,8.95 12.05,10.275 SW2.1@16.15,10.275
RXLED: D1.2 U2.14 | length 4.9
  Top Layer w0.25: D1.2 32.9,-3.6 33.1,-3.8 U2.14
SCL: R2.1 U1.3 U4.1 | length 38.2
  Top Layer w0.25: U1.3 19.75,-73.15 19.3,-72.7 17.594,-72.7 17.273,-72.379 17.273,-54.727 26.575,-45.425 26.75,-45.25 R2.1 ; R2.1@26.748,-44.952 28.35,-43.35 U4.1
SDA: R1.1 U1.1 U4.32 | length 37.8
  Top Layer w0.25: U1.1 17.85,-73.914 16.87,-72.934 16.87,-54.13 23.8,-47.2 23.8,-44.9 25.65,-43.05 25.65,-42.85 26.85,-41.65 U4.32
STEP1: J4.2 U4.11 | length 27.5
  Top Layer w0.25: U4.11 46.35,-40.65 J4.2
STEP2: J3.2 U4.13 | length 45.4
  Top Layer w0.25: U4.13 41.05,-39.65 54.1,-26.6 54.1,-10.9 J3.2
SW1: C19.2 R12.2 R15.2 U4.20 | length 54.8
  Top Layer w0.25: C19.2 19.525,6.75 19.379,6.604 19.379,3.591 20.705,2.264 20.705,-17.833 20.707,-17.835 20.707,-22.276 24.402,-25.971 24.402,-34.533 24.569,-34.7 28.669,-34.7 30.35,-36.381 U4.20
  Top Layer w0.381: C19.2 20.35,6.8 R12.2 R15.2
SW2: C23.2 R18.2 R20.2 U4.21 | length 55.6
  Top Layer w0.25: R18.2 15.55,6.85 20.303,2.097 20.303,-18 20.305,-18.002 20.305,-22.505 24,-26.2 24,-34.7 24.402,-35.102 28.502,-35.102 29.85,-36.45 U4.21
  Top Layer w0.381: R20.2 C23.2 15.35,6.9 R18.2
SW3: C18.2 R11.2 R14.2 U4.22 | length 17.7
  Top Layer w0.25: R14.2 R11.2 C18.2 20.4,-30.75 20.4,-33.305 22.6,-35.505 28.243,-35.505 29.35,-36.612 U4.22
SW4: C22.2 R17.2 R19.2 U4.23 | length 19.4
  Top Layer w0.25: C22.2 17.4,-30.55 17.4,-32.15 21.157,-35.907 28.076,-35.907 28.85,-36.681 U4.23
  Top Layer w0.381: C22.2 R17.2 R19.2
TXLED: D2.2 U2.7 | length 13.9
  Top Layer w0.25: D2.2 v1(30.6,-0.4) ; U2.7 v1(37,-6.8)
  Bottom Layer w0.25: v1(30.6,-0.4) 33.42,-0.4 37,-3.98 v1(37,-6.8)
USB_RX: pad.@27.262,-5.8 U2.17 U4.31 | length 47.3
  Top Layer w0.25: v1(25.05,-34) 25.05,-26.05 21.11,-22.11 21.11,-17.669 21.107,-17.667 21.107,-11.954 27.262,-5.8 31.4,-5.8 U2.17 ; v1(25.09,-41.55) 26.32,-41.55 26.72,-41.15 U4.31
  Bottom Layer w0.25: v1(25.05,-34) 25.05,-37.553 24.92,-37.682 24.92,-41.285 25.09,-41.455 v1(25.09,-41.55)
USB_TX: pad.@28.4,-9.9 U2.1 U4.30 | length 46
  Top Layer w0.25: v1(25.5,-40.9) 25.571,-40.9 25.821,-40.65 U4.30 ; v1(25.63,-33.4) 25.62,-33.39 25.62,-25.92 21.512,-21.812 21.512,-17.502 21.51,-17.5 21.51,-12.121 23.731,-9.9 31.6,-9.9 32.6,-8.9 U2.1
  Bottom Layer w0.25: v1(25.5,-40.9) 25.567,-40.833 25.567,-40.641 25.63,-40.579 v1(25.63,-33.4)
VDDIO2: C12.2 C13.2 L1.2 U4.10 | length 5.8
  Top Layer w0.25: U4.10 33.4,-41.15 L1.2 C13.2 C12.2 C12.2@34.8,-45.45
pads on no net: J1.4 J1.6 J6.1 J6.5 J6.6 J6.7 J6.8 J6.9 J6.10 R8.1 R13.1 U2.2 U2.4 U2.5 U2.6 U2.15 U2.16 U2.18 U2.19 U4.3 U4.4 U4.5 U4.8 U4.9 U4.33
copper on no net:
  other v3: 29,-41 30.1,-41 31.2,-41 29,-39.9 30.1,-39.9 31.2,-39.9 29,-38.8 30.1,-38.8 31.2,-38.8

## Polygon pours and split planes (outlines as drawn)
GND on Bottom Layer "GND_L04_P001" (solid, pour order 1): 17.5,-75 cw(c17.5,-72.5) 15,-72.5 15,-55 ccw(c10,-55) 10,-50 5,-50 cw(c5,-45) 0,-45 0,9 cw(c5,9) 5,14 55,14 cw(c55,9) 60,9 60,-45 cw(c55,-45) 55,-50 50,-50 ccw(c50,-55) 45,-55 45,-72.5 cw(c42.5,-72.5) 42.5,-75 40,-75 cw(c40,-72.5) 37.5,-72.5 37.5,-55 ccw(c32.5,-55) 32.5,-50 27.5,-50 ccw(c27.5,-55) 22.5,-55 22.5,-72.5 cw(c20,-72.5) 20,-75
GND on Top Layer "GND_L01_P000" (solid, pour order 0): 17.5,-75 cw(c17.5,-72.5) 15,-72.5 15,-55 ccw(c10,-55) 10,-50 5,-50 cw(c5,-45) 0,-45 0,9 cw(c5,9) 5,14 55,14 cw(c55,9) 60,9 60,-45 cw(c55,-45) 55,-50 50,-50 ccw(c50,-55) 45,-55 45,-72.5 cw(c42.5,-72.5) 42.5,-75 40,-75 cw(c40,-72.5) 37.5,-72.5 37.5,-55 ccw(c32.5,-55) 32.5,-50 27.5,-50 ccw(c27.5,-55) 22.5,-55 22.5,-72.5 cw(c20,-72.5) 20,-75
GND on Layer 2 (split plane): 302 vertices, not listed, extent 0.509,-74.491 59.491,13.491
5V on Layer 1 (split plane): 302 vertices, not listed, extent 0.509,-74.491 59.491,13.491

## Keep-outs
Keep-Out Layer:
  lines w0.01: 37.5,-55 ccw(c37.5,-55) 37.5,-55 ; 37.5,-55 ccw(c32.5,-55) 32.5,-50 27.5,-50 ccw(c27.5,-55) 22.5,-55 22.5,-72.5 cw(c20,-72.5) 20,-75 17.5,-75 cw(c17.5,-72.5) 15,-72.5 15,-55 ccw(c10,-55) 10,-50 5,-50 cw(c5,-45) 0,-45 0,9 cw(c5,9) 5,14 55,14 cw(c55,9) 60,9 60,-45 cw(c55,-45) 55,-50 50,-50 ccw(c50,-55) 45,-55 45,-72.5 cw(c42.5,-72.5) 42.5,-75 40,-75 cw(c40,-72.5) 37.5,-72.5 37.5,-55

## Silkscreen, mask and mechanical layers (free items; w line width, h text height)
Top Overlay:
  text "PF6" at 46.174,6.401 h2 r90
  text "PF5" at 42.774,6.301 h2 r90
  text "PF4" at 39.294,6.201 h2 r90
  text "PWR" at 48.388,5.501 h2 r90
  text "USER" at 44.674,5.001 h2 r90
  text "PF1 / BTN 2" at 8.301,4.378 h2
  text "PF0 / BTN 1" at 18.801,4.278 h2
  text "ERROR" at 37.874,3.6 h2 r90
  text "STATUS" at 41.274,3.1 h2 r90
  text "GND" at 46.8,0.629 h2
  text "PF2 / BTN 3" at 9.401,0.078 h2
  text "TX" at 23.606,-0.966 h2
  text "RX" at 23.501,-4.194 h2
  text "PD3 / STEP" at 42.795,-4.54 h2
  text "GND" at 9.4,-4.938 h2
  text "PD4 / DIR" at 43.616,-9.71 h2
  text "PF3 / BTN 4" at 9.401,-10.255 h2
  text "5V" at 48.438,-14.674 h2
  text "GND" at 9.4,-15.271 h2
  text "GND" at 46.364,-21.371 h2
  text "PC0 / TX" at 10.001,-22.022 h2
  text "PD1 / STEP" at 42.358,-26.54 h2
  text "PC1 / RX" at 10.001,-27.279 h2
  text "PD2 / DIR" at 43.179,-31.71 h2
  text "5V" at 10.001,-32.241 h2
  text "5V" at 48.001,-36.674 h2
  text "GND" at 10,-37.271 h2
  text "m" at 20.886,-53.725 h5 r180
  text "m" at 43.5,-53.725 h5 r180
Bottom Overlay:
  text "Made by Tor Brodtkorb" at 48.698,2.758 h3
  text "s" at 25.8,-29.142 h50

## Text inside footprints (layer, text, board x,y; h text height)
U3: Top Overlay "N" at 40.86,-72.51 h0.9 r180